# Altium PCB MBHP_CORE_LPC176x-edit.PcbDoc (part 2 of 2)
Units mil, origin at the board's own origin, x right, y up, seen from the top; angles counter-clockwise.
Board outline 4724.41 x 3937.01 mil, 2 copper layers (Top Layer, Bottom Layer), stack 61.855 mil thick; 70 components, 109 nets, 446 pads, 2 vias.
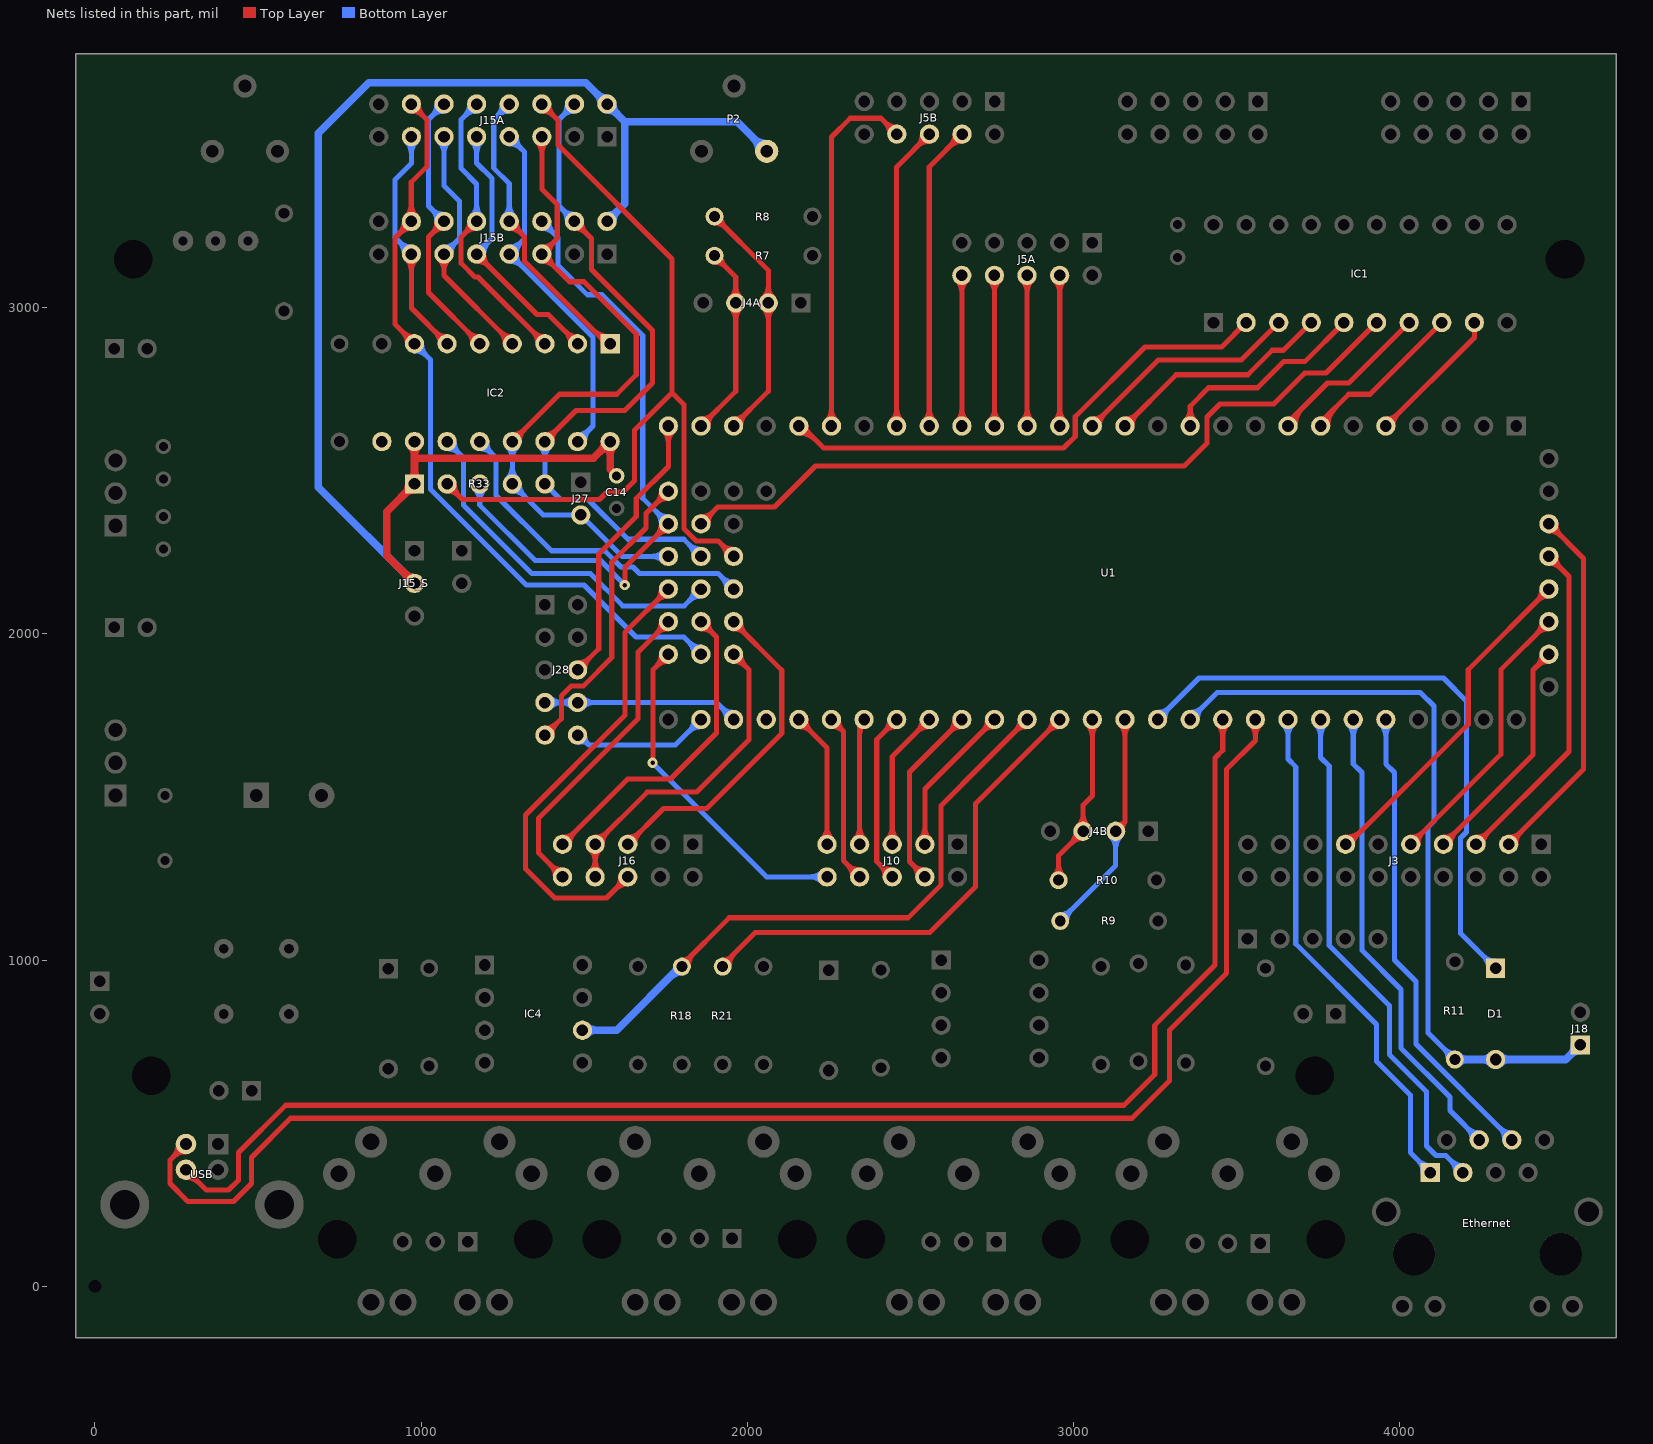
[diagram p2: the nets of this part, all layers, seen from the top]

## Via types
v1: diameter 31.5, hole 13.78, Top Layer to Bottom Layer, 2 vias

## Nets (pads, with @x,y where several pads share a name; then routed paths per layer and width w, separated by ;. In a path a pad name is that pad's centre, name@x,y a point inside that pad or via, vN(x,y) a via of type N, cw(c..) or ccw(c..) an arc to the next point about the centre after c; other vN are vias at no path point) (continued)
P0.3: J5B.8 U1.22 | length 1294.6
  Top Layer w15.75: U1.22@2243.23,2653.11 ccw(c2206.27,2690.07) 2258.54,2690.07 ccw(c2310.82,2690.07) U1.22@2273.85,2653.11 ; U1.22@2258.54,2637.8 2258.54,3523.54 2316.34,3581.34 2410.39,3581.34 J5B.8@2459.06,3532.68 ; J5B.8@2437.4,3532.68 ccw(c2385.13,3532.68) 2422.09,3569.64 ccw(c2459.06,3606.61) J5B.8@2459.06,3554.33
P0.4: D1.1 J18.1 R11.1 U1.38 | length 2745.9
  Bottom Layer w15.75: U1.38@3358.54,1737.8 3440.75,1820 4065,1820 4105.94,1779.06 4105.94,1425.94 4087.6,1407.6 4087.6,777.4 R11.1@4170,695 ; U1.38@3358.54,1759.45 ccw(c3358.54,1811.73) 3395.51,1774.76 ccw(c3432.47,1737.8) U1.38@3380.2,1737.8 ; R11.1@4150.32,695 ccw(c4102.79,695) 4136.4,728.6 ccw(c4170,762.21) R11.1@4170,714.69
  Bottom Layer w23.62: R11.1@4170,695 4294.76,695 D1.1@4295,695.24 4510.24,695.24 J18.1@4555,740 ; R11.1@4181.14,683.86 cw(c4208.02,656.98) 4208.02,695 cw(c4208.02,733.02) R11.1@4181.14,706.14 ; 4251.66,695 ccw(c4251.66,738.58) D1.1@4282.47,707.76 ; 4252.8,695 cw(c4252.8,653.03) D1.1@4282.47,682.71 ; D1.1@4307.53,682.71 cw(c4337.77,652.46) 4337.77,695.24 cw(c4337.77,738.01) D1.1@4307.53,707.76 ; J18.1@4537.28,740 cw(c4494.51,740) 4524.76,709.76 cw(c4555,679.51) J18.1@4555,722.28
P0.5: D1.2 U1.39 | length 2065.1
  Bottom Layer w15.75: U1.39@3258.54,1737.8 3385.75,1865 4135,1865 4205.94,1794.06 4205.94,1392.98 4187.6,1374.63 4187.6,1082.17 D1.2@4295,974.76 ; U1.39@3258.54,1759.45 ccw(c3258.54,1811.73) 3295.51,1774.76 ccw(c3332.47,1737.8) U1.39@3280.2,1737.8 ; D1.2@4273.35,974.76 ccw(c4221.07,974.76) 4258.04,1011.73 ccw(c4295,1048.69) D1.2@4295,996.42
P0.6: IC1.7 U1.8 | length 623.4
  Top Layer w15.75: U1.8@3658.54,2637.8 3658.54,2648.78 3779.76,2770 3845,2770 IC1.7@4030,2955 ; U1.8@3658.54,2659.45 ccw(c3658.54,2685.21) 3676.76,2666.99 ; U1.8@3664.45,2637.8 cw(c3705.22,2637.8) 3676.39,2666.63 ; U1.8@3680.2,2637.8 cw(c3758.99,2637.8) 3703.28,2693.51
P0.7: IC1.8 U1.7 | length 623.4
  Top Layer w15.75: U1.7@3758.54,2637.8 3758.54,2648.78 3844.76,2735 3910,2735 IC1.8@4130,2955 ; U1.7@3758.54,2659.45 ccw(c3758.54,2685.21) 3776.76,2666.99 ; U1.7@3764.45,2637.8 cw(c3805.22,2637.8) 3776.39,2666.63 ; U1.7@3780.2,2637.8 cw(c3858.99,2637.8) 3803.28,2693.51
P0.9: IC1.9 U1.5 | length 511.8
  Top Layer w15.75: U1.5@3958.54,2637.8 4230,2909.25 IC1.9@4230,2955 ; U1.5@3958.54,2659.45 ccw(c3958.54,2711.72) 3995.51,2674.76 ccw(c4032.47,2637.8) U1.5@3980.2,2637.8
P0.10: J4B.2 R9.2 U1.40 | length 991.7
  Top Layer w15.75: J4B.2@3130,1395 3158.54,1423.54 ; J4B.2@3134.29,1416.22 ccw(c3139.6,1442.49) 3158.54,1423.54 ; U1.40@3143.23,1722.48 cw(c3106.27,1685.52) 3158.54,1685.52 cw(c3210.82,1685.52) U1.40@3173.85,1722.48 ; J4B.2@3151.22,1399.29 cw(c3177.49,1404.6) 3158.54,1423.54 ; U1.40@3158.54,1737.8 3158.54,1423.54
  Bottom Layer w15.75: R9.2@2960,1120 3130,1290 J4B.2@3130,1395 ; R9.2@2960,1139.69 ccw(c2960,1187.21) 2993.6,1153.6 ccw(c3027.21,1120) R9.2@2979.68,1120 ; J4B.2@3114.69,1379.69 cw(c3077.72,1342.72) 3130,1342.72 cw(c3182.28,1342.72) J4B.2@3145.31,1379.69
P0.11: J4B.3 R10.2 U1.41 | length 856.7
  Top Layer w15.75: R10.2@2941.08,1258.92 ccw(c2907.48,1292.52) 2955,1292.52 ccw(c3002.52,1292.52) R10.2@2968.92,1258.92 ; R10.2@2955,1245 2955,1320 J4B.3@3030,1395 3030,1475 3058.54,1503.54 U1.41@3058.54,1737.8 ; J4B.3@3008.35,1395 cw(c2956.07,1395) 2993.04,1358.04 cw(c3030,1321.07) J4B.3@3030,1373.35 ; J4B.3@3014.69,1410.31 ccw(c2977.72,1447.28) 3030,1447.28 ccw(c3082.28,1447.28) J4B.3@3045.31,1410.31 ; U1.41@3043.23,1722.48 cw(c3006.27,1685.52) 3058.54,1685.52 cw(c3110.82,1685.52) U1.41@3073.85,1722.48
P0.15: IC1.4 U1.13 | length 785
  Top Layer w15.75: U1.13@3158.54,2637.8 3315.75,2795 3535,2795 3610,2870 3645,2870 IC1.4@3730,2955 ; U1.13@3158.54,2659.45 ccw(c3158.54,2711.72) 3195.51,2674.76 ccw(c3232.47,2637.8) U1.13@3180.2,2637.8
P0.16: IC1.3 U1.14 | length 785
  Top Layer w15.75: U1.14@3058.54,2637.8 3260.75,2840 3515,2840 IC1.3@3630,2955 ; U1.14@3058.54,2659.45 ccw(c3058.54,2711.72) 3095.51,2674.76 ccw(c3132.47,2637.8) U1.14@3080.2,2637.8
P0.18: IC1.5 U1.11 | length 720.5
  Top Layer w15.75: U1.11@3343.23,2653.11 ccw(c3306.27,2690.07) 3358.54,2690.07 ccw(c3410.82,2690.07) U1.11@3373.85,2653.11 ; U1.11@3358.54,2637.8 3358.54,2698.54 3415,2755 3564.76,2755 3644.76,2835 3710,2835 IC1.5@3830,2955
P0.21: IC1.2 U1.23 | length 1703.9
  Top Layer w15.75: U1.23@2158.54,2616.14 cw(c2158.54,2542.96) 2210.29,2594.71 ; U1.23@2158.54,2631.89 cw(c2158.54,2596.72) 2183.41,2621.59 ; U1.23@2158.54,2637.8 2167.2,2637.8 2235,2570 2970,2570 3005.94,2605.94 3005.94,2665.94 3220,2880 3455,2880 IC1.2@3530,2955 ; U1.23@2180.2,2637.8 ccw(c2211.56,2637.8) 2189.38,2615.62
P0.23: J5A.4 U1.15 | length 626
  Top Layer w15.75: J5A.4@2942.96,3084.29 cw(c2905.33,3046.66) 2958.54,3046.66 ; U1.15@2943.23,2653.11 ccw(c2906.27,2690.07) 2958.54,2690.07 ccw(c3010.82,2690.07) U1.15@2973.85,2653.11 ; U1.15@2958.54,2637.8 J5A.4@2958.54,3099.61 ; 2958.54,3048 cw(c3009.88,3048) J5A.4@2973.58,3084.29
P0.24: J5A.6 U1.16 | length 628.8
  Top Layer w15.75: J5A.6@2842.96,3084.29 cw(c2805.33,3046.66) 2858.54,3046.66 ; U1.16@2843.23,2653.11 ccw(c2806.27,2690.07) 2858.54,2690.07 ccw(c2910.82,2690.07) U1.16@2873.85,2653.11 ; U1.16@2858.54,2635 J5A.6@2858.54,3099.61 ; 2858.54,3048 cw(c2909.88,3048) J5A.6@2873.58,3084.29
P0.25: J5A.8 U1.17 | length 626
  Top Layer w15.75: J5A.8@2742.96,3084.29 cw(c2705.33,3046.66) 2758.54,3046.66 ; U1.17@2743.23,2653.11 ccw(c2706.27,2690.07) 2758.54,2690.07 ccw(c2810.82,2690.07) U1.17@2773.85,2653.11 ; U1.17@2758.54,2637.8 J5A.8@2758.54,3099.61 ; 2758.54,3048 cw(c2809.88,3048) J5A.8@2773.58,3084.29
P0.26: J5A.10 U1.18 | length 626
  Top Layer w15.75: J5A.10@2642.96,3084.29 cw(c2605.33,3046.66) 2658.54,3046.66 ; U1.18@2643.23,2653.11 ccw(c2606.27,2690.07) 2658.54,2690.07 ccw(c2710.82,2690.07) U1.18@2673.85,2653.11 ; U1.18@2658.54,2637.8 J5A.10@2658.54,3099.61 ; 2658.54,3048 cw(c2709.88,3048) J5A.10@2673.58,3084.29
P0.27: J4A.2 R8.2 U1.25 | length 1075.6
  Top Layer w15.75: R8.2@1900,3260.32 cw(c1900,3212.79) 1933.6,3246.4 cw(c1967.21,3280) R8.2@1919.69,3280 ; R8.2@1900,3280 2065,3115 J4A.2@2065,3015 2065,2744.25 U1.25@1958.54,2637.8 ; U1.25@1958.54,2659.45 ccw(c1958.54,2711.72) 1995.51,2674.76 ccw(c2032.47,2637.8) U1.25@1980.2,2637.8 ; J4A.2@2049.69,2999.69 cw(c2012.72,2962.72) 2065,2962.72 cw(c2117.28,2962.72) J4A.2@2080.31,2999.69 ; J4A.2@2049.69,3030.31 ccw(c2012.72,3067.28) 2065,3067.28 ccw(c2117.28,3067.28) J4A.2@2080.31,3030.31
P0.28: J4A.3 R7.2 U1.26 | length 914.2
  Top Layer w15.75: U1.26@1858.54,2637.8 1965,2744.25 J4A.3@1965,3015 1965,3095 R7.2@1900,3160 ; U1.26@1858.54,2659.45 ccw(c1858.54,2711.72) 1895.51,2674.76 ccw(c1932.47,2637.8) U1.26@1880.2,2637.8 ; R7.2@1900,3140.32 cw(c1900,3092.79) 1933.6,3126.4 cw(c1967.21,3160) R7.2@1919.69,3160 ; J4A.3@1949.69,2999.69 cw(c1912.72,2962.72) 1965,2962.72 cw(c2017.28,2962.72) J4A.3@1980.31,2999.69 ; J4A.3@1949.69,3030.31 ccw(c1912.72,3067.28) 1965,3067.28 ccw(c2017.28,3067.28) J4A.3@1980.31,3030.31
P1.18: J10.10 U1.81 | length 1197.1
  Top Layer w15.75: v1(1710,1605) 1711.14,1606.14 1711.14,1890.39 U1.81@1758.54,1937.8 ; U1.81@1736.89,1937.8 cw(c1684.61,1937.8) 1721.58,1900.83 cw(c1758.54,1863.87) U1.81@1758.54,1916.14
  Bottom Layer w15.75: v1(1710,1605) 2060,1255 J10.10@2245,1255 ; J10.10@2229.69,1239.69 ccw(c2192.72,1202.72) 2192.72,1255 ccw(c2192.72,1307.28) J10.10@2229.69,1270.31
P1.20: J16.7 J16.8 U1.79 | length 1315.5
  Top Layer w15.75: J16.8@1518.55,1270.31 ccw(c1481.58,1307.28) 1533.86,1307.28 ccw(c1586.13,1307.28) J16.8@1549.17,1270.31 ; J16.7@1518.55,1339.69 cw(c1481.58,1302.72) 1533.86,1302.72 cw(c1586.13,1302.72) J16.7@1549.17,1339.69 ; J16.8@1533.86,1255 J16.7@1533.86,1355 1693.86,1515 1845,1515 2005,1675 2005.94,1675 2005.94,1890.39 U1.79@1958.54,1937.8 ; J16.7@1533.86,1376.65 ccw(c1533.86,1428.93) 1570.82,1391.96 ccw(c1607.79,1355) J16.7@1555.51,1355 ; U1.79@1958.54,1916.14 cw(c1958.54,1863.87) 1995.51,1900.83 cw(c2032.47,1937.8) U1.79@1980.2,1937.8
P1.21: J16.10 U1.78 | length 1142.7
  Top Layer w15.75: J16.10@1412.2,1255 ccw(c1359.93,1255) 1396.89,1291.96 ccw(c1433.86,1328.93) J16.10@1433.86,1276.65 ; J16.10@1433.86,1255 1360,1328.86 1360,1435 1665,1740 1665,1944.25 U1.78@1758.54,2037.8 ; U1.78@1736.89,2037.8 cw(c1684.61,2037.8) 1721.58,2000.83 cw(c1758.54,1963.87) U1.78@1758.54,2016.14
P1.22: J16.9 U1.77 | length 1139
  Top Layer w15.75: J16.9@1433.86,1355 1633.86,1555 1765,1555 1905.94,1695.94 1905.94,1990.39 U1.77@1858.54,2037.8 ; J16.9@1433.86,1376.65 ccw(c1433.86,1428.93) 1470.82,1391.96 ccw(c1507.79,1355) J16.9@1455.51,1355 ; U1.77@1858.54,2016.14 cw(c1858.54,1963.87) 1895.51,2000.83 cw(c1932.47,2037.8) U1.77@1880.2,2037.8
P1.23: J16.5 U1.76 | length 1180.6
  Top Layer w15.75: J16.5@1633.86,1355 1743.86,1465 1875.94,1465 2105.94,1695 2105.94,1889.06 U1.76@1957.87,2037.13 ; J16.5@1633.86,1376.65 ccw(c1633.86,1428.93) 1670.82,1391.96 ccw(c1707.79,1355) J16.5@1655.51,1355 ; U1.76@1958.54,2016.14 cw(c1958.54,1967.1) 1993.22,2001.78 ; U1.76@1980.2,2037.8 ccw(c2035.7,2037.8) 1996.45,1998.55
P1.24: J16.6 U1.75 | length 1581.7
  Top Layer w15.75: J16.6@1612.2,1255 cw(c1559.93,1255) 1596.89,1218.04 cw(c1633.86,1181.07) J16.6@1633.86,1233.35 ; J16.6@1633.86,1255 1568.86,1190 1410,1190 1320,1280 1320,1445 1625,1750 1625,2004.25 U1.75@1758.54,2137.8 ; U1.75@1736.89,2137.8 cw(c1684.61,2137.8) 1721.58,2100.83 cw(c1758.54,2063.87) U1.75@1758.54,2116.14
P1.25: IC2.11 U1.74 | length 1257.7
  Bottom Layer w15.75: IC2.11@1080,2568.35 cw(c1080,2516.07) 1116.96,2553.04 cw(c1153.93,2590) IC2.11@1101.65,2590 ; IC2.11@1080,2590 1130,2540 1130,2395 1340,2185 1520,2185 1618.66,2086.34 1807.09,2086.34 U1.74@1858.54,2137.8 ; U1.74@1836.89,2137.8 cw(c1784.61,2137.8) 1821.58,2100.83 cw(c1858.54,2063.87) U1.74@1858.54,2116.14
P1.26: IC2.12 U1.73 | length 1197.4
  Bottom Layer w15.75: IC2.12@1180,2568.35 cw(c1180,2516.07) 1216.96,2553.04 cw(c1253.93,2590) IC2.12@1201.65,2590 ; IC2.12@1180,2590 1230,2540 1230,2425 1400,2255 1563.59,2255 1613.59,2205 1650,2205 1669.8,2185.2 1911.14,2185.2 U1.73@1958.54,2137.8 ; U1.73@1936.89,2137.8 ccw(c1884.61,2137.8) 1921.58,2174.76 ccw(c1958.54,2211.73) U1.73@1958.54,2159.45
P1.27: IC2.13 J15A.11 J15B.11 J27.2 R33.4 U1.72 | length 2738
  Top Layer w15.75: IC2.13@1280,2590 1425,2735 1600,2735 1660,2795 1660,2920 1500,3080 1455,3080 1370.47,3164.53 J15B.11@1370.47,3165 1417.87,3212.4 1417.87,3317.13 1370.47,3364.53 J15A.11@1370.47,3525 ; IC2.13@1280,2611.65 ccw(c1280,2663.93) 1316.96,2626.96 ccw(c1353.93,2590) IC2.13@1301.65,2590 ; J15A.11@1355.16,3509.69 cw(c1318.2,3472.72) 1370.47,3472.72 cw(c1422.75,3472.72) J15A.11@1385.78,3509.69 ; J15B.11@1370.47,3143.35 cw(c1370.47,3092.21) 1406.63,3128.37 ; J15B.11@1370.47,3186.65 ccw(c1370.47,3238.93) 1407.44,3201.96 ccw(c1444.4,3165) 1392.13,3165 ccw(c1445.54,3165) 1407.77,3127.23
  Bottom Layer w15.75: R33.4@1264.69,2475.31 ccw(c1227.72,2512.28) 1280,2512.28 ccw(c1332.28,2512.28) R33.4@1295.31,2475.31 ; IC2.13@1264.69,2574.69 cw(c1227.72,2537.72) 1280,2537.72 cw(c1332.28,2537.72) IC2.13@1295.31,2574.69 ; R33.4@1280,2438.35 cw(c1280,2386.07) 1316.96,2423.04 cw(c1353.93,2460) R33.4@1301.65,2460 ; IC2.13@1280,2590 R33.4@1280,2460 1375,2365 J27.2@1490,2365 1617.2,2237.8 U1.72@1758.54,2237.8 ; U1.72@1743.23,2222.48 ccw(c1706.27,2185.52) 1706.27,2237.8 ccw(c1706.27,2290.07) U1.72@1743.23,2253.11
P1.28: IC2.14 J15A.14 J15B.14 R33.5 U1.71 | length 2591.3
  Top Layer w15.75: IC2.14@1380,2590 1475,2685 1625,2685 1710,2770 1710,2930.67 1523.07,3117.6 1523.07,3212.4 J15B.14@1470.47,3265 ; IC2.14@1380,2611.65 ccw(c1380,2663.93) 1416.96,2626.96 ccw(c1453.93,2590) IC2.14@1401.65,2590 ; J15B.14@1470.47,3243.35 cw(c1470.47,3191.07) 1507.44,3228.04 cw(c1544.4,3265) J15B.14@1492.13,3265
  Bottom Layer w15.75: IC2.14@1364.69,2574.69 cw(c1327.72,2537.72) 1380,2537.72 cw(c1432.28,2537.72) IC2.14@1395.31,2574.69 ; IC2.14@1380,2590 R33.5@1380,2460 1427.4,2412.6 1512.4,2412.6 1634.61,2290.39 1805.94,2290.39 U1.71@1858.54,2237.8 ; J15B.14@1448.82,3265 ccw(c1396.54,3265) 1433.51,3301.96 ccw(c1470.47,3338.93) J15B.14@1470.47,3286.65 ; J15A.14@1448.82,3625 cw(c1396.54,3625) 1433.51,3588.04 cw(c1470.47,3551.07) J15A.14@1470.47,3603.35 ; J15B.14@1470.47,3265 1423.07,3312.4 1423.07,3577.6 J15A.14@1470.47,3625 ; U1.71@1836.89,2237.8 ccw(c1784.61,2237.8) 1821.58,2274.76 ccw(c1858.54,2311.73) U1.71@1858.54,2259.45
P1.29: J15A.12 R33.2 U1.70 | length 2852.5
  Top Layer w15.75: R33.2@1080,2438.35 cw(c1080,2386.07) 1116.96,2423.04 cw(c1153.93,2460) R33.2@1101.65,2460 ; R33.2@1080,2460 1127.4,2412.6 1547.6,2412.6 1570,2435 1620,2435 1655,2470 1655,2625 1770,2740 ; J15A.12@1370.47,3603.35 cw(c1370.47,3551.07) 1407.44,3588.04 cw(c1444.4,3625) J15A.12@1392.13,3625 ; J15A.12@1370.47,3625 1420,3575.47 1420,3500 1770,3150 1770,2740 ; U1.70@1936.89,2237.8 ccw(c1884.61,2237.8) 1921.58,2274.76 ccw(c1958.54,2311.73) U1.70@1958.54,2259.45 ; U1.70@1958.54,2237.8 1911.14,2285.2 1844.11,2285.2 1805.94,2323.36 1805.94,2704.06 1770,2740
P1.30: J5B.4 U1.19 | length 1100.7
  Top Layer w15.75: U1.19@2543.23,2653.11 ccw(c2506.27,2690.07) 2558.54,2690.07 ccw(c2610.82,2690.07) U1.19@2573.85,2653.11 ; U1.19@2558.54,2637.8 2558.54,3432.17 J5B.4@2659.06,3532.68 ; J5B.4@2637.4,3532.68 cw(c2585.13,3532.68) 2622.09,3495.71 cw(c2659.06,3458.75) J5B.4@2659.06,3511.02
P1.31: J5B.6 U1.20 | length 1103.5
  Top Layer w15.75: U1.20@2443.23,2653.11 ccw(c2406.27,2690.07) 2458.54,2690.07 ccw(c2510.82,2690.07) U1.20@2473.85,2653.11 ; U1.20@2458.54,2635 2458.54,3432.17 J5B.6@2559.06,3532.68 ; J5B.6@2537.4,3532.68 cw(c2485.13,3532.68) 2522.09,3495.71 cw(c2559.06,3458.75) J5B.6@2559.06,3511.02
P2.0: R21.1 U1.42 | length 1651.1
  Top Layer w15.75: R21.1@1925,985 2025,1085 2560,1085 2700,1225 2700,1479.25 U1.42@2958.54,1737.8 ; R21.1@1925,999.69 ccw(c1925,1035.14) 1950.07,1010.07 ; R21.1@1944.69,980 cw(c2004.28,980) 1962.14,1022.14 ; U1.42@2936.89,1737.8 cw(c2884.61,1737.8) 2921.58,1700.83 cw(c2958.54,1663.87) U1.42@2958.54,1716.14
P2.1: IC4.6 R18.1 U1.43 | length 2184.2
  Top Layer w15.75: R18.1@1800,985 1945,1130 2493.74,1130 2595,1231.26 2595,1474.25 2725,1604.25 U1.43@2858.54,1737.8 ; R18.1@1800,999.69 ccw(c1800,1035.14) 1825.07,1010.07 ; R18.1@1819.69,980 cw(c1879.28,980) 1837.14,1022.14 ; U1.43@2836.89,1737.8 cw(c2784.61,1737.8) 2821.58,1700.83 cw(c2858.54,1663.87) U1.43@2858.54,1716.14
  Bottom Layer w23.62: IC4.6@1495,785 1600,785 R18.1@1800,985 ; IC4.6@1507.53,772.47 cw(c1537.77,742.23) 1537.77,785 cw(c1537.77,827.77) IC4.6@1507.53,797.53 ; 1764.58,949.58 cw(c1800,914.16) R18.1@1800,964.25 ; 1776.65,961.65 ccw(c1758.3,980) R18.1@1784.25,980
P2.2: J10.3 U1.44 | length 635.5
  Top Layer w15.75: J10.3@2529.69,1370.31 ccw(c2492.72,1407.28) 2545,1407.28 ccw(c2597.28,1407.28) J10.3@2560.31,1370.31 ; J10.3@2545,1355 2545,1524.25 U1.44@2758.54,1737.8 ; U1.44@2736.89,1737.8 cw(c2684.61,1737.8) 2721.58,1700.83 cw(c2758.54,1663.87) U1.44@2758.54,1716.14
P2.3: J10.4 U1.45 | length 733.3
  Top Layer w15.75: J10.4@2523.35,1255 ccw(c2471.07,1255) 2508.04,1291.96 ccw(c2545,1328.93) J10.4@2545,1276.65 ; J10.4@2545,1255 2497.6,1302.4 2497.6,1576.85 U1.45@2658.54,1737.8 ; U1.45@2636.89,1737.8 cw(c2584.61,1737.8) 2621.58,1700.83 cw(c2658.54,1663.87) U1.45@2658.54,1716.14
P2.4: J10.5 U1.46 | length 594.1
  Top Layer w15.75: J10.5@2429.69,1370.31 ccw(c2392.72,1407.28) 2445,1407.28 ccw(c2497.28,1407.28) J10.5@2460.31,1370.31 ; J10.5@2445,1355 2445,1624.25 U1.46@2558.54,1737.8 ; U1.46@2536.89,1737.8 cw(c2484.61,1737.8) 2521.58,1700.83 cw(c2558.54,1663.87) U1.46@2558.54,1716.14
P2.5: J10.6 U1.47 | length 691.9
  Top Layer w15.75: J10.6@2423.35,1255 ccw(c2371.07,1255) 2408.04,1291.96 ccw(c2445,1328.93) J10.6@2445,1276.65 ; U1.47@2436.89,1737.8 cw(c2384.61,1737.8) 2421.58,1700.83 cw(c2458.54,1663.87) U1.47@2458.54,1716.14 ; J10.6@2445,1255 2397.6,1302.4 2397.6,1676.85 U1.47@2458.54,1737.8
P2.6: J10.7 U1.48 | length 518
  Top Layer w15.75: J10.7@2329.69,1370.31 ccw(c2292.72,1407.28) 2345,1407.28 ccw(c2397.28,1407.28) J10.7@2360.31,1370.31 ; J10.7@2345,1355 2345,1724.25 U1.48@2358.54,1737.8 ; 2345,1690.84 cw(c2405.5,1690.84) U1.48@2362.72,1733.62
P2.7: J10.8 U1.49 | length 681.1
  Top Layer w15.75: U1.49@2258.54,1737.8 2295,1701.34 ; U1.49@2258.76,1716.14 cw(c2259.26,1665.6) 2295,1701.34 ; U1.49@2280.2,1737.58 ccw(c2330.74,1737.08) 2295,1701.34 ; J10.8@2323.35,1255 ccw(c2271.07,1255) 2308.04,1291.96 ccw(c2345,1328.93) J10.8@2345,1276.65 ; J10.8@2345,1255 2295,1305 2295,1701.34
P2.8: J10.9 U1.50 | length 582.8
  Top Layer w15.75: U1.50@2158.54,1716.14 cw(c2158.54,1663.87) 2195.51,1700.83 cw(c2232.47,1737.8) U1.50@2180.2,1737.8 ; U1.50@2158.54,1737.8 2245,1651.34 J10.9@2245,1355 ; J10.9@2229.69,1370.31 ccw(c2192.72,1407.28) 2245,1407.28 ccw(c2297.28,1407.28) J10.9@2260.31,1370.31
P2.10: U1.51
P2.11: J28.7 J28.8 U1.52 | length 928.6
  Bottom Layer w15.75: J28.7@1380,1790 1906.34,1790 U1.52@1958.54,1737.8 ; J28.7@1395.31,1774.45 cw(c1432.85,1736.92) 1432.85,1790 ; J28.7@1395.31,1805.08 ccw(c1431.71,1841.47) 1431.71,1790 ; 1427.15,1790 cw(c1427.15,1736.92) J28.8@1464.69,1774.45 ; 1428.29,1790 ccw(c1428.29,1841.47) J28.8@1464.69,1805.08 ; J28.8@1495.31,1774.45 cw(c1532.85,1736.92) 1532.85,1790 ; J28.8@1495.31,1805.08 ccw(c1531.71,1841.47) 1531.71,1790 ; U1.52@1936.89,1737.8 ccw(c1884.61,1737.8) 1921.58,1774.76 ccw(c1958.54,1811.73) U1.52@1958.54,1759.45
P2.12: J28.10 U1.53 | length 557.1
  Bottom Layer w15.75: J28.10@1484.85,1668.66 cw(c1492.11,1637.11) 1515,1660 ; J28.10@1490,1685 1515,1660 ; J28.10@1501.65,1689.76 ccw(c1541.29,1689.76) 1513.26,1661.74 ; U1.53@1836.89,1737.8 cw(c1784.61,1737.8) 1821.58,1700.83 cw(c1858.54,1663.87) U1.53@1858.54,1716.14 ; U1.53@1858.54,1737.8 1780.75,1660 1515,1660
P2.13: J28.6 U1.27 | length 1027.6
  Top Layer w15.75: J28.6@1480,1889.76 1545,1954.76 1545,2245 1660,2360 1660,2415 1758.54,2513.54 U1.27@1758.54,2637.8 ; J28.6@1480,1911.42 ccw(c1480,1963.69) 1516.96,1926.73 ccw(c1553.93,1889.76) J28.6@1501.65,1889.76 ; U1.27@1743.23,2622.48 cw(c1706.27,2585.52) 1758.54,2585.52 cw(c1810.82,2585.52) U1.27@1773.85,2622.48
P3.25: J15B.12 R33.3 U1.69 | length 2297.4
  Top Layer w15.75: v1(1625,2150) 1625,2204.25 U1.69@1758.54,2337.8 ; U1.69@1736.89,2337.8 cw(c1684.61,2337.8) 1721.58,2300.83 cw(c1758.54,2263.87) U1.69@1758.54,2316.14
  Bottom Layer w15.75: R33.3@1164.69,2444.69 cw(c1127.72,2407.72) 1180,2407.72 cw(c1232.28,2407.72) R33.3@1195.31,2444.69 ; R33.3@1180,2460 1180,2395 1350,2225 1550,2225 v1(1625,2150) ; J15B.12@1370.47,3243.35 cw(c1370.47,3191.07) 1407.44,3228.04 cw(c1444.4,3265) J15B.12@1392.13,3265 ; J15B.12@1370.47,3265 1420.08,3215.39 1420.08,3129.92 1510,3040 1555,3040 1680,2915 1680,2416.34 U1.69@1758.54,2337.8 ; U1.69@1736.89,2337.8 ccw(c1684.61,2337.8) 1721.58,2374.76 ccw(c1758.54,2411.73) U1.69@1758.54,2359.45
P3.26: IC1.6 U1.68 | length 2456.1
  Top Layer w15.75: U1.68@1858.54,2337.8 1910.08,2389.33 2084.33,2389.33 2210,2515 3340,2515 3410,2585 3410,2665 3450,2705 3614.76,2705 3709.76,2800 3775,2800 IC1.6@3930,2955 ; U1.68@1858.54,2359.45 ccw(c1858.54,2411.73) 1895.51,2374.76 ccw(c1932.47,2337.8) U1.68@1880.2,2337.8
P4.29: J28.9 U1.66 | length 1090.9
  Top Layer w15.75: J28.9@1380,1689.76 1430.24,1740 1430.24,1810.24 1460,1840 1497.27,1840 1585,1927.73 1585,2220.21 1690,2325.21 1690,2369.25 U1.66@1758.54,2437.8 ; J28.9@1380,1711.42 ccw(c1380,1763.69) 1416.96,1726.73 ccw(c1453.93,1689.76) J28.9@1401.65,1689.76 ; U1.66@1736.89,2437.8 cw(c1684.61,2437.8) 1721.58,2400.83 cw(c1758.54,2363.87) U1.66@1758.54,2416.14
Q0: IC2.15 J15A.9 J15B.9 | length 1429.7
  Bottom Layer w15.75: J15B.9@1270.47,3143.35 cw(c1270.47,3087.3) 1310.11,3126.93 ; J15B.9@1270.47,3186.65 ccw(c1270.47,3238.93) 1307.44,3201.96 ccw(c1344.4,3165) 1292.13,3165 ccw(c1340.63,3165) 1306.33,3130.7 ; J15A.9@1270.47,3503.35 cw(c1270.47,3451.07) 1307.44,3488.04 cw(c1344.4,3525) J15A.9@1292.13,3525 ; J15A.9@1270.47,3525 1317.87,3477.6 1317.87,3212.4 J15B.9@1270.47,3165 1272.04,3165 1527.4,2909.63 1527.4,2637.4 IC2.15@1480,2590 ; IC2.15@1480,2611.65 ccw(c1480,2663.93) 1516.96,2626.96 ccw(c1553.93,2590) IC2.15@1501.65,2590
Q1: IC2.1 J15A.10 J15B.10 | length 1267
  Top Layer w15.75: J15B.10@1270.47,3243.35 cw(c1270.47,3191.07) 1307.44,3228.04 cw(c1344.4,3265) J15B.10@1292.13,3265 ; J15B.10@1270.47,3265 1317.87,3217.6 1317.87,3142.13 1570,2890 IC2.1@1580,2890 ; 1525.96,2934.04 ccw(c1580,2988.07) IC2.1@1580,2911.65 ; 1550.11,2909.89 cw(c1530.21,2890) IC2.1@1558.35,2890 ; IC2.1@1552.85,2907.15 ccw(c1580,2934.3) IC2.1@1580,2895.91
  Bottom Layer w15.75: J15A.10@1248.82,3625 cw(c1196.54,3625) 1233.51,3588.04 cw(c1270.47,3551.07) J15A.10@1270.47,3603.35 ; J15B.10@1255.16,3280.31 ccw(c1218.2,3317.28) 1270.47,3317.28 ccw(c1322.75,3317.28) J15B.10@1285.78,3280.31 ; J15B.10@1270.47,3265 1270.47,3380.94 1223.07,3428.34 1223.07,3577.6 J15A.10@1270.47,3625
Q2: IC2.2 J15A.7 J15B.7 | length 1151.2
  Top Layer w15.75: J15B.7@1170.47,3143.35 cw(c1170.47,3091.07) 1207.44,3128.04 cw(c1244.4,3165) J15B.7@1192.13,3165 ; J15B.7@1170.47,3165 1355.47,2980 1390,2980 IC2.2@1480,2890 ; IC2.2@1458.35,2890 ccw(c1406.07,2890) 1443.04,2926.96 ccw(c1480,2963.93) IC2.2@1480,2911.65
  Bottom Layer w15.75: J15A.7@1155.16,3509.69 cw(c1118.2,3472.72) 1170.47,3472.72 cw(c1222.75,3472.72) J15A.7@1185.78,3509.69 ; J15B.7@1170.47,3165 1217.87,3212.4 1217.87,3397.13 1170.47,3444.53 J15A.7@1170.47,3525 ; J15B.7@1170.47,3186.65 ccw(c1170.47,3238.93) 1207.44,3201.96 ccw(c1244.4,3165) J15B.7@1192.13,3165
Q3: IC2.3 J15A.8 J15B.8 | length 1234.6
  Top Layer w15.75: J15B.8@1148.82,3265 cw(c1096.54,3265) 1133.51,3228.04 cw(c1170.47,3191.07) J15B.8@1170.47,3243.35 ; J15B.8@1170.47,3265 1123.07,3217.6 1123.07,3136.93 1165,3095 1175,3095 IC2.3@1380,2890 ; IC2.3@1358.35,2890 ccw(c1306.07,2890) 1343.04,2926.96 ccw(c1380,2963.93) IC2.3@1380,2911.65
  Bottom Layer w15.75: J15A.8@1148.82,3625 cw(c1096.54,3625) 1133.51,3588.04 cw(c1170.47,3551.07) J15A.8@1170.47,3603.35 ; J15B.8@1155.16,3280.31 ccw(c1118.2,3317.28) 1170.47,3317.28 ccw(c1222.75,3317.28) J15B.8@1185.78,3280.31 ; J15B.8@1170.47,3265 1170.47,3379.53 1123.07,3426.93 1123.07,3577.6 J15A.8@1170.47,3625
Q4: IC2.4 J15A.5 J15B.5 | length 1089.5
  Top Layer w15.75: J15B.5@1055.16,3149.69 cw(c1018.2,3112.72) 1070.47,3112.72 cw(c1122.75,3112.72) J15B.5@1085.78,3149.69 ; J15B.5@1070.47,3165 1070.47,3099.53 IC2.4@1280,2890 ; IC2.4@1258.35,2890 ccw(c1206.07,2890) 1243.04,2926.96 ccw(c1280,2963.93) IC2.4@1280,2911.65
  Bottom Layer w15.75: J15A.5@1055.16,3509.69 cw(c1018.2,3472.72) 1070.47,3472.72 cw(c1122.75,3472.72) J15A.5@1085.78,3509.69 ; J15B.5@1070.47,3165 1117.87,3212.4 1117.87,3327.13 1070.47,3374.53 J15A.5@1070.47,3525 ; J15B.5@1070.47,3186.65 ccw(c1070.47,3238.93) 1107.44,3201.96 ccw(c1144.4,3165) J15B.5@1092.13,3165
Q5: IC2.5 J15A.6 J15B.6 | length 1187.4
  Top Layer w15.75: J15B.6@1048.82,3265 cw(c996.54,3265) 1033.51,3228.04 cw(c1070.47,3191.07) J15B.6@1070.47,3243.35 ; J15B.6@1070.47,3265 1023.07,3217.6 1023.07,3046.93 IC2.5@1180,2890 ; IC2.5@1158.35,2890 ccw(c1106.07,2890) 1143.04,2926.96 ccw(c1180,2963.93) IC2.5@1180,2911.65
  Bottom Layer w15.75: J15B.6@1048.82,3265 ccw(c996.54,3265) 1033.51,3301.96 ccw(c1070.47,3338.93) J15B.6@1070.47,3286.65 ; J15A.6@1048.82,3625 cw(c996.54,3625) 1033.51,3588.04 cw(c1070.47,3551.07) J15A.6@1070.47,3603.35 ; J15B.6@1070.47,3265 1023.07,3312.4 1023.07,3577.6 J15A.6@1070.47,3625
Q6: IC2.6 J15A.3 J15B.3 | length 1050.6
  Top Layer w15.75: J15B.3@955.16,3149.69 cw(c918.2,3112.72) 970.47,3112.72 cw(c1022.75,3112.72) J15B.3@985.78,3149.69 ; J15B.3@970.47,3165 970.47,2999.53 IC2.6@1080,2890 ; IC2.6@1058.35,2890 ccw(c1006.07,2890) 1043.04,2926.96 ccw(c1080,2963.93) IC2.6@1080,2911.65
  Bottom Layer w15.75: J15B.3@948.82,3165 ccw(c896.54,3165) 933.51,3201.96 ccw(c970.47,3238.93) J15B.3@970.47,3186.65 ; J15A.3@955.16,3509.69 cw(c918.2,3472.72) 970.47,3472.72 cw(c1022.75,3472.72) J15A.3@985.78,3509.69 ; J15B.3@970.47,3165 920,3215.47 920,3392.64 970.47,3443.11 J15A.3@970.47,3525
Q7: IC2.7 J15A.4 J15B.4 U1.80 | length 2818.6
  Top Layer w15.75: J15B.4@948.82,3265 cw(c896.54,3265) 933.51,3228.04 cw(c970.47,3191.07) J15B.4@970.47,3243.35 ; J15B.4@955.16,3280.31 ccw(c919.34,3316.14) 970,3316.14 ; IC2.7@958.35,2890 ccw(c906.07,2890) 943.04,2926.96 ccw(c980,2963.93) IC2.7@980,2911.65 ; J15B.4@970,3265.47 970,3385 1017.87,3432.87 1017.87,3577.6 J15A.4@970.47,3625 ; 970,3318.42 ccw(c1023.89,3318.42) J15B.4@985.78,3280.31 ; J15B.4@970.47,3265 920,3214.53 920,2950 IC2.7@980,2890 ; J15A.4@970.47,3603.35 cw(c970.47,3551.07) 1007.44,3588.04 cw(c1044.4,3625) J15A.4@992.13,3625
  Bottom Layer w15.75: J15B.4@970,3265.47 J15B.4@970.47,3265 ; IC2.7@980,2868.35 cw(c980,2816.07) 1016.96,2853.04 cw(c1053.93,2890) IC2.7@1001.65,2890 ; IC2.7@980,2890 1028.91,2841.09 1028.91,2444.06 1322.96,2150 1500,2150 1659.61,1990.39 1805.94,1990.39 U1.80@1858.54,1937.8 ; U1.80@1836.89,1937.8 ccw(c1784.61,1937.8) 1821.58,1974.76 ccw(c1858.54,2011.73) U1.80@1858.54,1959.45
Q8: IC2.9
RD+: Ethernet.4 U1.33 | length 1613.6
  Bottom Layer w15.75: U1.33@3843.23,1722.48 cw(c3806.27,1685.52) 3858.54,1685.52 cw(c3910.82,1685.52) U1.33@3873.85,1722.48 ; U1.33@3858.54,1737.8 3858.54,1601.46 3885,1575 3885,1030 4005,910 4005,730 4154.91,580.09 4154.91,538.4 Ethernet.4@4244.88,448.43 ; Ethernet.4@4223.23,448.43 ccw(c4170.95,448.43) 4207.92,485.39 ccw(c4244.88,522.35) Ethernet.4@4244.88,470.08
RD-: Ethernet.6 U1.32 | length 1613.6
  Bottom Layer w15.75: U1.32@3943.23,1722.48 cw(c3906.27,1685.52) 3958.54,1685.52 cw(c4010.82,1685.52) U1.32@3973.85,1722.48 ; U1.32@3958.54,1737.8 3958.54,1601.46 3985,1575 3985,1383.33 3985.08,1383.25 3985.08,1000.06 4050.75,934.39 4050.75,742.56 Ethernet.6@4344.88,448.43 ; Ethernet.6@4323.23,448.43 ccw(c4270.95,448.43) 4307.92,485.39 ccw(c4344.88,522.35) Ethernet.6@4344.88,470.08
TCK: J3.9 U1.57 | length 1022.5
  Top Layer w15.75: J3.9@4035,1355 4311.14,1631.14 4311.14,1890.39 U1.57@4458.54,2037.8 ; J3.9@4035,1376.65 ccw(c4035,1428.93) 4071.96,1391.96 ccw(c4108.93,1355) J3.9@4056.65,1355 ; U1.57@4436.89,2037.8 cw(c4384.61,2037.8) 4421.58,2000.83 cw(c4458.54,1963.87) U1.57@4458.54,2016.14
TD+: Ethernet.1 U1.35 | length 1734.3
  Bottom Layer w15.75: U1.35@3643.23,1722.48 cw(c3606.27,1685.52) 3658.54,1685.52 cw(c3710.82,1685.52) U1.35@3673.85,1722.48 ; U1.35@3658.54,1737.8 3658.54,1616.46 3682.4,1592.6 3682.4,1049.81 3930,802.22 3930,690 4033.54,586.46 4033.54,409.76 Ethernet.1@4094.88,348.43 ; Ethernet.1@4073.23,348.43 ccw(c4020.95,348.43) 4057.92,385.39 ccw(c4094.88,422.35) Ethernet.1@4094.88,370.08
TD-: Ethernet.3 U1.34 | length 1751.8
  Bottom Layer w15.75: U1.34@3743.23,1722.48 cw(c3706.27,1685.52) 3758.54,1685.52 cw(c3810.82,1685.52) U1.34@3773.85,1722.48 ; U1.34@3758.54,1737.8 3758.54,1621.46 3785,1595 3785,1045 3970,860 3970,710 4083.54,596.46 4083.54,430 4112.52,401.02 4142.28,401.02 Ethernet.3@4194.88,348.43 ; Ethernet.3@4173.23,348.43 ccw(c4120.95,348.43) 4157.92,385.39 ccw(c4194.88,422.35) Ethernet.3@4194.88,370.08
TDI: J3.5 U1.59 | length 1190.5
  Top Layer w15.75: J3.5@4235,1355 4520,1640 4520,2176.34 U1.59@4458.54,2237.8 ; J3.5@4235,1376.65 ccw(c4235,1428.93) 4271.96,1391.96 ccw(c4308.93,1355) J3.5@4256.65,1355 ; U1.59@4458.54,2216.14 cw(c4458.54,2163.87) 4495.51,2200.83 cw(c4532.47,2237.8) U1.59@4480.2,2237.8
TDO: J3.13 U1.58 | length 1209.9
  Top Layer w15.75: J3.13@3835,1355 3842.78,1355 4211.14,1723.36 4211.14,1890.39 U1.58@4458.54,2137.8 ; J3.13@3835,1376.65 ccw(c3835,1447.72) 3885.25,1397.47 ; J3.13@3856.65,1355 cw(c3890.14,1355) 3866.46,1378.68 ; U1.58@4436.89,2137.8 cw(c4384.61,2137.8) 4421.58,2100.83 cw(c4458.54,2063.87) U1.58@4458.54,2116.14
TMS: J3.7 U1.56 | length 881
  Top Layer w15.75: J3.7@4135,1355 4410,1630 4410,1889.25 U1.56@4458.54,1937.8 ; J3.7@4135,1376.65 ccw(c4135,1428.93) 4171.96,1391.96 ccw(c4208.93,1355) J3.7@4156.65,1355 ; U1.56@4436.89,1937.8 cw(c4384.61,1937.8) 4421.58,1900.83 cw(c4458.54,1863.87) U1.56@4458.54,1916.14
TRST: J3.3 U1.60 | length 1286.4
  Top Layer w15.75: J3.3@4335,1355 4565,1585 4565,2231.34 U1.60@4458.54,2337.8 ; J3.3@4335,1376.65 ccw(c4335,1428.93) 4371.96,1391.96 ccw(c4408.93,1355) J3.3@4356.65,1355 ; U1.60@4458.54,2316.14 cw(c4458.54,2263.87) 4495.51,2300.83 cw(c4532.47,2337.8) U1.60@4480.2,2337.8
"USB D+": U1.37 USB.3 | length 4542.8
  Top Layer w15.75: USB.3@279.33,333.58 cw(c279.33,276.55) 319.66,316.88 cw(c359.98,357.2) USB.3@302.95,357.2 ; USB.3@282.8,357.2 USB.3@279.33,357.2 341.54,295 410,295 440,325 440,410 585,555 3155,555 ; 3155.33,554.67 3250,649.33 3250,800 3435,985 3435,1620 3458.54,1643.54 U1.37@3458.54,1737.8 ; U1.37@3443.23,1722.48 cw(c3406.27,1685.52) 3458.54,1685.52 cw(c3510.82,1685.52) U1.37@3473.85,1722.48
"USB D-": U1.36 USB.2 | length 4818
  Top Layer w15.75: USB.2@255.71,435.94 cw(c198.68,435.94) 239.01,395.62 cw(c279.33,355.29) USB.2@279.33,412.32 ; USB.2@279.33,435.94 229.96,386.57 229.96,315.04 285,260 425,260 480,315 480,395 600,515 3180,515 3295,630 3295,785 3470,960 3470,1585 3558.54,1673.54 U1.36@3558.54,1737.8 ; U1.36@3543.23,1722.48 cw(c3506.27,1685.52) 3558.54,1685.52 cw(c3610.82,1685.52) U1.36@3573.85,1722.48
VCC: C14.1 IC2.10 IC2.16 J15_S.2 J15A.16 J15B.16 P2.1 R33.1 | length 5357.8
  Top Layer w23.62: J15_S.2@962.28,2155 ccw(c919.51,2155) 949.76,2185.24 ccw(c980,2215.49) J15_S.2@980,2172.72 ; R33.1@962.28,2460 cw(c919.51,2460) 949.76,2429.76 cw(c980,2399.51) R33.1@980,2442.28 ; R33.1@967.47,2472.53 ccw(c937.23,2502.77) 980,2502.77 ccw(c1022.77,2502.77) R33.1@992.53,2472.53 ; IC2.10@967.47,2577.47 cw(c937.23,2547.23) 980,2547.23 cw(c1022.77,2547.23) IC2.10@992.53,2577.47 ; J15_S.2@980,2155 895,2240 895,2375 R33.1@980,2460 980,2538.66 ; IC2.10@980,2590 980,2538.66 ; IC2.16@1562.28,2590 cw(c1519.51,2590) 1549.76,2559.76 cw(c1580,2529.51) IC2.16@1580,2572.28 ; IC2.16@1567.47,2577.47 cw(c1537.23,2547.23) 1580,2547.23 cw(c1622.77,2547.23) IC2.16@1592.53,2577.47 ; C14.1@1600,2485 1580,2505 IC2.16@1580,2590 1528.66,2538.66 980,2538.66
  Bottom Layer w23.62: J15_S.2@962.28,2155 ccw(c919.51,2155) 949.76,2185.24 ccw(c980,2215.49) J15_S.2@980,2172.72 ; J15_S.2@980,2155 685,2450 685,3535 840,3690 1505.47,3690 J15A.16@1570.47,3625 1625,3570.47 ; J15A.16@1552.76,3625 ccw(c1509.98,3625) 1540.23,3655.24 ccw(c1570.47,3685.49) J15A.16@1570.47,3642.72 ; J15B.16@1570.47,3265 1625,3319.53 1625,3570.47 ; J15B.16@1570.47,3282.72 ccw(c1570.47,3325.49) 1600.72,3295.24 ccw(c1630.96,3265) J15B.16@1588.19,3265 ; J15A.16@1570.47,3607.28 cw(c1570.47,3564.51) 1600.72,3594.76 cw(c1630.96,3625) J15A.16@1588.19,3625 ; P2.1@2036.38,3480 ccw(c1979.35,3480) 2019.67,3520.33 ccw(c2060,3560.65) P2.1@2060,3503.62 ; P2.1@2060,3480 1969.53,3570.47 1625,3570.47
pads on no net: "MIDI IN1.0" "MIDI IN1.1" "MIDI IN1.2" "MIDI IN1.3" "MIDI IN2.0" "MIDI IN2.1" "MIDI IN2.2" "MIDI IN2.3" "MIDI OUT1.0" "MIDI OUT1.1" "MIDI OUT1.3" "MIDI OUT2.0" "MIDI OUT2.1" "MIDI OUT2.3" Ethernet.2 Ethernet.5 Ethernet.7 Ethernet.MH3 Ethernet.MH4 IC4.1 IC4.4 IC5.1 IC5.4 J3.15 J13.2 J21.2 J28.5 R2.5 U1.2 U1.3 U1.4 U1.24 U1.29 U1.30 U1.31 U1.61 U1.63 U1.64 U1.65 U1.67

## Polygon pours and split planes (outlines as drawn)
GND on Top Layer "Top-GND" (hatched 45Degree grid 20 track 9.06, remove dead copper, pour order 2): -50,-150 -50,3765 4650,3765 4650,-150
GND on Bottom Layer "Bottom-GND" (hatched 45Degree grid 20 track 9.06, remove dead copper, pour order 4): -50,-150 -50,3765 4650,3765 4650,-150

## Silkscreen, mask and mechanical layers (free items; w line width, h text height)
Top Overlay:
  lines w7.87: 1150,3049.65 1150,3100 1295,3100 1295,3049.65 ; 1150,3409.65 1150,3460 1295,3460 1295,3409.65
  text "Vs" at 2540,3700 h23.62
  text "SI" at 3345,3695 h23.62
  text "5Vd" at 3430,3695 h23.62
  text "Vs" at 3555,3695 h23.62
  text "RC2" at 3135,3690 h23.62
  text "SC" at 3245,3690 h23.62
  text "SI" at 4145,3690 h23.62
  text "5Vd" at 4245,3690 h23.62
  text "RC2" at 3945,3685 h23.62
  text "SC" at 4055,3685 h23.62
  text "Vs" at 4345,3685 h23.62
  text "B-" at 860,3675 h23.62
  text "D7" at 960,3675 h23.62
  text "D5" at 1055,3675 h23.62
  text "D3" at 1155,3675 h23.62
  text "D1" at 1255,3675 h23.62
  text "E" at 1360,3675 h23.62
  text "RS" at 1450,3675 h23.62
  text "Vd" at 1540,3675 h23.62
  text "SC" at 4060,3465 h23.62
  text "RC1" at 3950.83,3463.07 h23.62
  text "RC1" at 3145,3460 h23.62
  text "SC" at 3245,3460 h23.62
  text "SO" at 3355,3460 h23.62
  text "5Vcc" at 3440,3460 h23.62
  text "Vs" at 3555,3460 h23.62
  text "SO" at 4155,3460 h23.62
  text "5Vd" at 4245,3460 h23.62
  text "Vs" at 4345,3460 h23.62
  text "A7" at 2340,3455 h23.62
  text "A6" at 2440,3455 h23.62
  text "A5" at 2535,3455 h23.62
  text "A4" at 2640,3455 h23.62
  text "3.3Vd" at 2720,3455 h23.62
  text "B+" at 855,3440 h23.62
  text "D6" at 955,3440 h23.62
  text "D4" at 1050,3440 h23.62
  text "RW" at 1355,3440 h23.62
  text "V0" at 1460,3440 h23.62
  text "Vs" at 1555,3435 h23.62
  text "D2" at 1165,3425 h23.62
  text "D0" at 1245,3425 h23.62
  text "B-" at 855,3325 h23.62
  text "D7" at 960,3325 h23.62
  text "D5" at 1055,3325 h23.62
  text "D3" at 1155,3325 h23.62
  text "D1" at 1255,3320 h23.62
  text "E" at 1360,3315 h23.62
  text "RS" at 1450,3315 h23.62
  text "Vd" at 1545,3315 h23.62
  text "Vs" at 2830,3265 h23.62
  text "B+" at 850,3085 h23.62
  text "D6" at 950,3085 h23.62
  text "D4" at 1055,3085 h23.62
  text "RW" at 1360,3085 h23.62
  text "V0" at 1460,3085 h23.62
  text "Vs" at 1545,3080 h23.62
  text "D2" at 1165,3065 h23.62
  text "D0" at 1240,3065 h23.62
  text "3.3Vd" at 3020,3025 h23.62
  text "A3" at 2640,3020 h23.62
  text "A2" at 2740,3020 h23.62
  text "A1" at 2845,3020 h23.62
  text "A0" at 2940,3020 h23.62
  text "Vs" at 1830,2925 h23.62
  text "SC" at 1925,2925 h23.62
  text "SD" at 2030,2925 h23.62
  text "5Vd" at 2145,2925 h23.62
  text "+5V" at 1060,2325 h78.74
  text "+5V" at 795,2235 h78.74
  text "GND" at 1345,2140 h23.62
  text "GND" at 1450,2140 h23.62
  text "LCD" at 750,2130 h78.74
  text "Vs" at 1095,2040 h78.74
  text "3.3Vd" at 1360,2025 h23.62
  text "+3.3V" at 730,2015 h78.74
  text "I2SSDA" at 1450,1825 h23.62
  text "I2SCLK" at 1280,1725 h23.62
  text "I2SCLK" at 1455,1725 h23.62
  text "I2SWS" at 1470,1626.68 h23.62
  text "I2SMCLK" at 1280,1625 h23.62
  text "Vs" at 2905,1465 h23.62
  text "SC" at 3000,1465 h23.62
  text "SD" at 3105,1465 h23.62
  text "5Vd" at 3220,1465 h23.62
  text "SI" at 1615,1420 h23.62
  text "RC2" at 1410,1415 h23.62
  text "SC" at 1515,1415 h23.62
  text "3.3Vd" at 1695,1415 h23.62
  text "Vs" at 1835,1415 h23.62
  text "D2" at 2425,1415 h23.62
  text "D6" at 2225,1410 h23.62
  text "D4" at 2325,1410 h23.62
  text "D0" at 2525,1410 h23.62
  text "Vs" at 2615,1410 h23.62
  text "SO" at 1615,1185 h23.62
  text "RC1" at 1415,1180 h23.62
  text "SC" at 1515,1180 h23.62
  text "3.3Vd" at 1680,1180 h23.62
  text "D7" at 2230,1180 h23.62
  text "D5" at 2330,1180 h23.62
  text "D3" at 2430,1180 h23.62
  text "D1" at 2535,1180 h23.62
  text "Vs" at 1830,1175 h23.62
  text "3.3Vd" at 2610,1175 h23.62
  text "JTAG" at 4300,1020 h157.48
  text "optional" at 4395,965 h78.74
  text "Vs" at 4525,914.67 h23.62
  text "USB" at 180,805 h78.74
  text "Power" at 185,740 h78.74
  text "Option" at 240,675 h78.74
Poly:
  lines w1.97: -50,-150 4650,-150 4650,3765 -50,3765 -50,-150
BoardMeasuring:
  text "Zeropoint" at -705,-275 h157.48
Drill Drawing:
  text ".Legend" at 294.3,4822.66 h59.06
BoardOutline:
  circle w1.97: c0,0 r19.68
  lines w1.97: -59.06,-157.48 4665.35,-157.48 4665.35,3779.53 -59.06,3779.53 -59.06,-157.48

## Dimensions
-59.06,-157.48 to 4665.35,-157.48 on BoardMeasuring
4665.35,-157.48 to 4665.35,3779.53 on BoardMeasuring
0,0 to -200,-120 on BoardMeasuring

## Text inside footprints (layer, text, board x,y; h text height)
C8: Top Overlay "+" at 290,1640 h59.06 r180
C10: Top Overlay "+" at -35,2120 h39.37
C12: Top Overlay "+" at -67.17,2906.5 h39.37
J3: Top Overlay "1" at 4520,1340 h50
J5A: Top Overlay "1" at 3133.27,3204.61 h50
J5B: Top Overlay "1" at 2830,3627.68 h50
J8/9: Top Overlay "1" at 4450,3617.68 h50
J10: Top Overlay "1" at 2716.54,1350 h50
J15A: Top Overlay "1" at 1645,3495 h50
J15B: Top Overlay "1" at 1645,3140 h50
J16: Top Overlay "1" at 1908.86,1360 h50
J19: Top Overlay "1" at 3630,3617.68 h50
J28: Top Overlay "1" at 1300,2090 h50
P1: Top Overlay "CW" at 550,3385 h27.56
P2: Top Overlay "CW" at 2080,3380 h27.56
USB: BaseArea "PCB Edge" at 106.04,-142.2 h9.84
X1: Top Overlay "+" at 484.37,1019.25 h78.74 r90; Top Overlay "-" at 562.32,823.58 h78.74 r90; Top Overlay "~" at 480.83,818.46 h78.74 r90; Top Overlay "~" at 564.29,1017.68 h78.74 r90